# EAGLE board floppyemu (EAGLE 6.3)
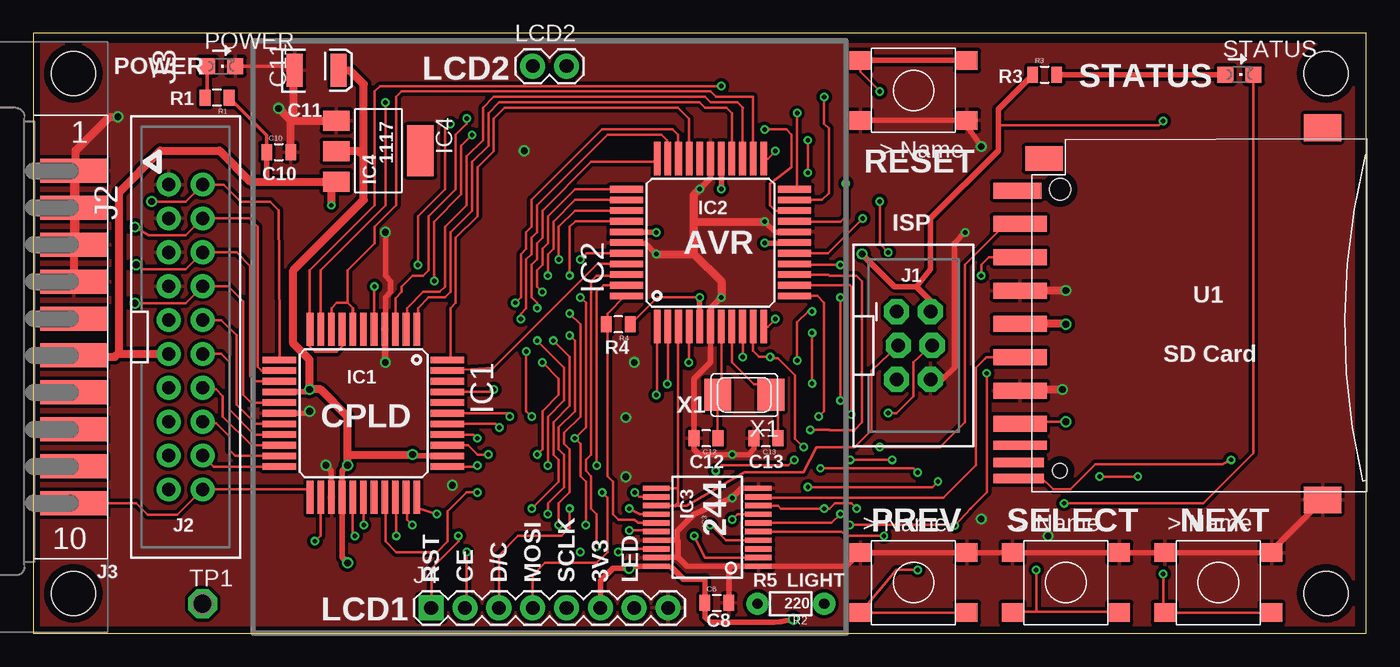
[diagram p0: board, top side]
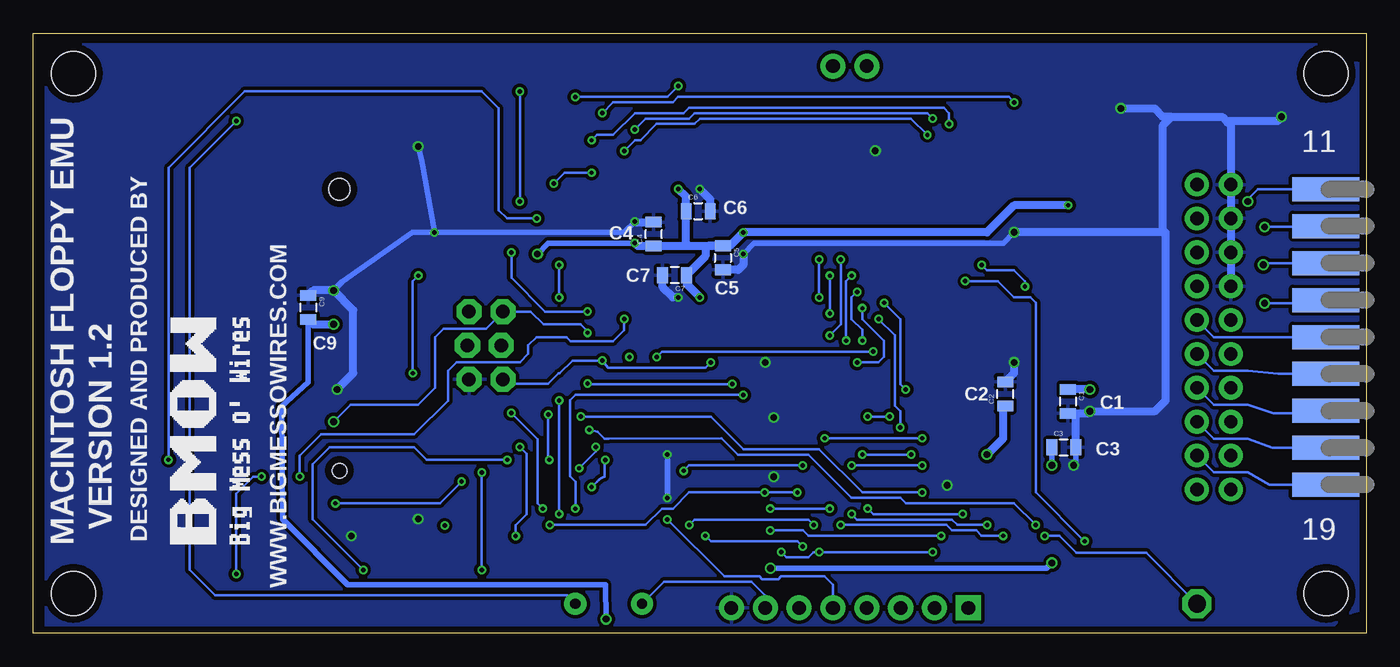
[diagram p1: board, bottom side, seen from below]

Size 100 x 45 mm. Coordinates in mm from the lower left corner, seen from the top.
Outline: 0,0 100,0 100,45 0,45 0,0
Copper layers (1*16): Top 0.035mm / dielectric 1.5mm / Bottom 0.035mm
Design rules "smart-prototyping": minimum track width 7mil, minimum drill 12mil, track to track 7mil, track to pad 7mil, pad to pad 7mil, via to via 7mil, smd to smd 0mil, copper to edge 20mil, drill to drill 10mil, minimum pad ring 10mil, minimum via ring 6mil, stop-mask expansion 2mil, vias tented up to drill 25mil, thermal gap 10mil

## Footprints (pad centres in the part's own frame; a part is rotated, then mirrored left to right if it is on the bottom)
0805 = smd 0.8 x 1.2: 1 -0.9,0; 2 0.9,0
EIA3528 = smd 1.2 x 2.5: A 1.65,0; C -1.65,0
TQFP44-LONGPADS = smd 2.5 x 0.5: 1 -6.3,4; 2 -6.3,3.2; 3 -6.3,2.4; 4 -6.3,1.6; 5 -6.3,0.8; 6 -6.3,0; 7 -6.3,-0.8; 8 -6.3,-1.6; 9 -6.3,-2.4; 10 -6.3,-3.2; 11 -6.3,-4; 23 6.3,-4; 24 6.3,-3.2; 25 6.3,-2.4; 26 6.3,-1.6; 27 6.3,-0.8; 28 6.3,0; 29 6.3,0.8; 30 6.3,1.6; 31 6.3,2.4; 32 6.3,3.2; 33 6.3,4 | smd 0.5 x 2.5: 12 -4,-6.3; 13 -3.2,-6.3; 14 -2.4,-6.3; 15 -1.6,-6.3; 16 -0.8,-6.3; 17 0,-6.3; 18 0.8,-6.3; 19 1.6,-6.3; 20 2.4,-6.3; 21 3.2,-6.3; 22 4,-6.3; 34 4,6.3; 35 3.2,6.3; 36 2.4,6.3; 37 1.6,6.3; 38 0.8,6.3; 39 0,6.3; 40 -0.8,6.3; 41 -1.6,6.3; 42 -2.4,6.3; 43 -3.2,6.3; 44 -4,6.3
BIG-MESS-O-WIRES_TQFP44-LONGPADS = smd 2.5 x 0.5: 1 -6.3,4; 2 -6.3,3.2; 3 -6.3,2.4; 4 -6.3,1.6; 5 -6.3,0.8; 6 -6.3,0; 7 -6.3,-0.8; 8 -6.3,-1.6; 9 -6.3,-2.4; 10 -6.3,-3.2; 11 -6.3,-4; 23 6.3,-4; 24 6.3,-3.2; 25 6.3,-2.4; 26 6.3,-1.6; 27 6.3,-0.8; 28 6.3,0; 29 6.3,0.8; 30 6.3,1.6; 31 6.3,2.4; 32 6.3,3.2; 33 6.3,4 | smd 0.5 x 2.5: 12 -4,-6.3; 13 -3.2,-6.3; 14 -2.4,-6.3; 15 -1.6,-6.3; 16 -0.8,-6.3; 17 0,-6.3; 18 0.8,-6.3; 19 1.6,-6.3; 20 2.4,-6.3; 21 3.2,-6.3; 22 4,-6.3; 34 4,6.3; 35 3.2,6.3; 36 2.4,6.3; 37 1.6,6.3; 38 0.8,6.3; 39 0,6.3; 40 -0.8,6.3; 41 -1.6,6.3; 42 -2.4,6.3; 43 -3.2,6.3; 44 -4,6.3
SSOP20 = smd 0.4 x 2: 1 -2.925,-3.825; 2 -2.275,-3.825; 3 -1.625,-3.825; 4 -0.975,-3.825; 5 -0.325,-3.825; 6 0.325,-3.825; 7 0.975,-3.825; 8 1.625,-3.825; 9 2.275,-3.825; 10 2.925,-3.825; 11 2.925,3.825; 12 2.275,3.825; 13 1.625,3.825; 14 0.975,3.825; 15 0.325,3.825; 16 -0.325,3.825; 17 -0.975,3.825; 18 -1.625,3.825; 19 -2.275,3.825; 20 -2.925,3.825
SOT223 = smd 1.499 x 2.007: 1 -2.261,-3.15; 2 0.025,-3.15; 3 2.311,-3.15 | smd 3.81 x 2.007: 4 0,3.15
BIG-MESS-O-WIRES_2X3-SHROUDED = drill 1.016 pad 1.88 octagon: 1 -1.27,2.54; 2 1.27,2.54; 3 -1.143,0; 4 1.397,0; 5 -1.27,-2.54; 6 1.27,-2.54
IDC20 = drill 1 pad 1.778: 1 -11.43,-1.27; 2 -11.43,1.27; 3 -8.89,-1.27; 4 -8.89,1.27; 5 -6.35,-1.27; 6 -6.35,1.27; 7 -3.81,-1.27; 8 -3.81,1.27; 9 -1.27,-1.27; 10 -1.27,1.27; 11 1.27,-1.27; 12 1.27,1.27; 13 3.81,-1.27; 14 3.81,1.27; 15 6.35,-1.27; 16 6.35,1.27; 17 8.89,-1.27; 18 8.89,1.27; 19 11.43,-1.27; 20 11.43,1.27
DB19EDGE = smd 1.8 x 5: 1 -12.465,3; 2 -9.695,3; 3 -6.925,3; 4 -4.155,3; 5 -1.385,3; 6 1.385,3; 7 4.155,3; 8 6.925,3; 9 9.695,3; 10 12.465,3 | smd 1.8 x 5 bottom: 11 -11.08,3; 12 -8.31,3; 13 -5.54,3; 14 -2.77,3; 15 0,3; 16 2.77,3; 17 5.54,3; 18 8.31,3; 19 11.08,3
1X08 = drill 1.016 pad 1.88 square: 1 0,0 | drill 1.016 pad 1.88: 2 2.54,0; 3 5.08,0; 4 7.62,0; 5 10.16,0; 6 12.7,0; 7 15.24,0; 8 17.78,0
1X02 = drill 1.016 pad 1.88: 1 0,0; 2 2.54,0
B3FS = smd 1.6 x 1.4: A 4,2.25; A' -4,2.25; B 4,-2.25; B' -4,-2.25
CHIPLED_0805 = smd 1.2 x 1.2: A 0,-1.05; C 0,1.05
1/6W-RES = drill 0.762 pad 1.676: 1 -2.5,0; 2 2.5,0
STAND-OFF = hole 3.302: 0,0
P1-13 = drill 1.321 pad 2.159 octagon: TP 0,0
ADAFRUIT_06132 = smd 1.2 x 4: 1 6.9,0.9; 2 4.4,0.9; 3 1.9,0.9; 4 -0.6,0.9; 5 -3.1,0.9; 6 -5.6,0.9; 7 -8.1,0.9 | smd 0.7 x 4: 8 -9.7,0.9 | smd 1.2 x 3.6: 9 9.4,1.1 | smd 0.7 x 3.8: CD -11,1; WP -12.2,1 | smd 2 x 2.8: GP -13.8,-21.8; GP2 14.1,-21.8 | smd 1.8 x 2.8: GP3 11.8,-0.9 | hole 1.1: -11.6,-2.1 | hole 1.6: 9.5,-2.1
NX5032 = smd 2 x 2.4: P$1 2,0; P$2 -2,0

## Placement (x,y rotation side)
C1  0.1uF  [0805]  22.38,17.4 270 bottom
C2  0.1uF  [0805]  27.08,17.96 90 bottom
C3  0.1uF  [0805]  22.68,13.94 0 bottom
C4  0.1uF  [0805]  53.47,29.95 90 bottom
C5  0.1uF  [0805]  48.26,28.17 270 bottom
C6  0.1uF  [0805]  50.11,31.67 0 bottom
C7  0.1uF  [0805]  51.89,26.87 180 bottom
C8  0.1uF  [0805]  51.28,2.29 0 top
C9  0.1uF  [0805]  79.38,24.45 270 bottom
C10  0.1uF  [0805]  18.41,36.09 0 top
C11  33uF  [EIA3528]  21.27,42.23 0 top
C12  18pF  [0805]  50.47,14.63 180 top
C13  18pF  [0805]  54.97,14.63 180 top
IC1  XC9572XLTQFP44  [TQFP44-LONGPADS]  24.77,16.51 270 top
IC2  BIG-MESS-O-WIRES_ATMEGA1284  [BIG-MESS-O-WIRES_TQFP44-LONGPADS]  50.8,29.31 90 top
IC3  74LVC244  [SSOP20]  50.57,7.95 90 top
IC4  REG1117  [SOT223]  25.88,36.2 270 top
J1  BIG-MESS-O-WIRES_AVR_ISP  [BIG-MESS-O-WIRES_2X3-SHROUDED]  66.04,21.59 0 top
J2  IDC20  [IDC20]  11.43,22.23 270 top
J3  DB19  [DB19EDGE]  0.03,22.23 270 top
J4  LCD1  [1X08]  29.84,1.91 0 top
LCD2  M02PTH  [1X02]  37.47,42.55 0 top
NEXT  B3FS-10XX  [B3FS]  88.9,3.81 0 top
POWER  [CHIPLED_0805]  14.1,42.53 270 top
PREV  B3FS-10XX  [B3FS]  66.04,3.81 0 top
R1  220R  [0805]  13.79,40.17 180 top
R2  220  [1/6W-RES]  56.83,2.22 180 top
R3  220R  [0805]  75.88,41.91 0 top
R4  10K  [0805]  43.89,23.16 180 top
RESET  B3FS-10XX  [B3FS]  66.04,40.72 180 top
SELECT  B3FS-10XX  [B3FS]  77.47,3.81 0 top
STANDOFF1  STAND-OFF  [STAND-OFF]  3,3 0 top
STANDOFF2  STAND-OFF  [STAND-OFF]  3,42 0 top
STANDOFF3  STAND-OFF  [STAND-OFF]  97,3 0 top
STANDOFF4  STAND-OFF  [STAND-OFF]  97,42 0 top
STATUS  [CHIPLED_0805]  90.49,41.91 270 top
TP1  PTR1PAD1-13  [P1-13]  12.7,2.22 0 top
U1  ADAFRUIT_SDMMC06132  [ADAFRUIT_06132]  74.93,23.81 90 top
X1  20 MHz  [NX5032]  53.34,17.88 180 top

## Library data of the parts
C1-C10 C12 C13 J4 R1 R3 R4 = SparkFun
C11 = SparkFun-Capacitors; PROD_ID: CAP-08310; VALUE: 47uF
IC1-IC3 J1-J3 NEXT PREV RESET SELECT U1 = big-mess-o-wires
IC4 = burr-brown; MPN: REG1117; OC_FARNELL: 1097566; OC_NEWARK: 14P6981
LCD2 = SparkFun-Connectors
POWER STATUS = led
R2 = SparkFun-Resistors
STANDOFF1-STANDOFF4 = SparkFun-Electromechanical
TP1 = testpad
X1 = adafruit

## Nets
+3V3: C1.1 C2.1 C3.1 C8.1 C9.2 C11.A IC1.15 IC1.26 IC1.35 IC3.20 IC4.2 J4.6 U1.4
+5V: C4.1 C5.1 C6.1 C7.1 C10.1 IC2.5 IC2.17 IC2.27 IC2.38 IC4.3 J1.2 J2.11 J3.6 R1.1 R2.1 R3.1 R4.1
/ENBL.EXT: IC1.20 J2.14 J3.17
/WREQ: IC1.18 J2.10 J3.15
/WREQM: IC1.5 IC2.19
BYTER/TDI: IC1.7 IC1.9 IC2.24
CLKO: IC1.43 IC2.41
D0: IC1.31 IC2.37
D1: IC1.32 IC2.36
D2: IC1.33 IC2.35
D3: IC1.34 IC2.34
D4: IC1.36 IC2.33
D5: IC1.38 IC2.32
D6: IC1.41 IC2.31
DC: IC2.15 IC3.6
DC33: IC3.14 J4.3
DIN/STA/TCK: IC1.8 IC1.11 IC2.21
EJECT: IC1.30 IC2.12
GND: C1.2 C2.2 C3.2 C4.2 C5.2 C6.2 C7.2 C8.2 C9.1 C10.2 C11.C C12.2 C13.2 IC1.4 IC1.17 IC1.25 IC2.6 IC2.18 IC2.28 IC2.39 IC3.1 IC3.10 IC3.17 IC3.19 IC4.1 J1.6 J2.1 J2.3 J2.5 J2.7 J3.1 J3.2 J3.3 J3.4 J4.8 NEXT.A NEXT.A' POWER.C PREV.A PREV.A' RESET.A RESET.A' SELECT.A SELECT.A' U1.3 U1.6 U1.GP
LCDE: IC2.42 IC3.2
LCDE33: IC3.18 J4.2
LEDD: IC2.43 STATUS.C
MISO: IC2.2 J1.1 U1.7
MOSI: IC2.1 IC3.8 J1.4
MOSI33: IC3.12 J4.4 U1.2
N$1: C13.1 IC2.8 X1.P$2
N$2: POWER.A R1.2
N$3: C12.1 IC2.7 X1.P$1
N$5: R3.2 STATUS.A
N$10: J4.7 R2.2
NEXT: IC2.11 NEXT.B NEXT.B'
OE: IC1.2 IC2.25
PH0: IC1.12 J2.2 J3.11
PH1: IC1.13 J2.4 J3.12
PH2: IC1.14 J2.6 J3.13
PH3: IC1.16 J2.8 J3.14
PREV: IC2.10 PREV.B PREV.B'
PWM: IC1.23 J2.20 J3.10
RD: IC1.21 J2.16 J3.18
RDAWRT: IC1.44 IC2.30
RESET: IC2.4 J1.5 RESET.B RESET.B'
RST: IC1.37 IC2.40 IC3.4
RST33: IC3.16 J4.1
SCK: IC2.3 IC3.11 IC3.13 J1.3
SCK33: IC3.9 U1.5
SCK33A: IC3.7 J4.5
SDE: IC2.44 IC3.15 R4.2
SDE33: IC3.5 U1.1
SEL: IC1.19 J2.12 J3.16
SELECT: IC2.13 SELECT.B SELECT.B'
SIDE: IC1.3 IC2.20
STPDIR_MOTOR: IC1.1 IC2.26
STPREQ: IC1.39 IC2.9
TACH: IC1.28 IC2.14
TDO: IC1.24 IC2.23
TEST: IC1.27 TP1.TP
TMS: IC1.10 IC2.22
WPROT: IC2.16 U1.WP
WR: IC1.22 J2.18 J3.19

## Tracks (layer width: path | path; a pad name or v marks a point on that pad's centre or on a via)
+3V3  (via drill 0.51)
  Top 0.406: v20.73,18.29 20.55,18.11 IC1.15 | v23.57,12.6 23.16,12.19 IC1.26 | v28.45,13.41 28.55,13.31 IC1.35 | IC1.26 | v44.7,4.88 44.45,5.03 | 44.45,5.03 IC3.20 47.64,5.03 47.95,4.88 48.77,4.06 50.39,4.06 50.38,4.05 C8.1 50.39,2.27 50.39,1.22 50.8,0.81 52.83,0.81 55.56,0.83 56.07,0.88 v57.02,1.07 | v23.57,5.28 23.16,5.69 IC1.26 | 44.45,5.03 44.3,4.88 43.48,4.88 42.55,3.94 J4.6
  Top 0.61: U1.4 77.44,23.21 v77.47,23.18 | 24.79,35.76 24.79,32.51 19.51,27.23 19.51,21.74 20.73,20.52 v20.73,18.29 21.54,18.29 23.57,16.26 23.57,13.41 | 24.79,35.76 24.38,36.17 IC4.2 | 24.79,35.76 24.79,41.18 23.75,42.23 C11.A | v23.57,12.6 23.57,13.41 | 23.57,13.41 v28.45,13.41
  Bottom 0.406: 22.37,18.29 C1.1 | C3.1 23.58,12.61 v23.57,12.6 | 27.23,16.91 C2.1 | v44.7,4.88 23.98,4.88 v23.57,5.28 | v57.02,1.07 57.07,3.66 76.4,3.66 78.84,6.1 78.84,6.13 81.28,8.57 81.38,17.02 79.38,18.82 C9.2
  Bottom 0.61: v77.47,23.18 79,23.18 C9.2 | 22.37,18.29 v20.73,18.29 v20.74,18.3 C1.1 | 27.23,16.91 27.23,14.63 v28.45,13.41
+5V  (via drill 0.33, 0.51)
  Top 0.203: R4.1 46.82,25.2 v49.99,25.2 | v84.77,38.42 84.45,38.1 72.39,38.1
  Top 0.254: R1.1 17.52,37.35 C10.1
  Top 0.406: C10.1 17.52,33.92 17.48,33.88 | IC2.5 49.99,23.02 v49.99,25.2 | IC2.17 57.05,29.26 v54.86,29.26 | IC2.27 51.61,35.6 v51.61,33.33 | IC2.38 44.54,30.07 v46.74,30.07 | v62.18,28.45 64.62,26.01 66.24,26.01 | 66.24,26.01 67.31,24.94 J1.2 | 66.24,26.01 67.31,27.3 67.31,31.11 72.39,36.2 72.39,38.1 72.39,39.32 R3.1
  Top 0.61: J3.6 3.11,20.73 6.12,20.73 6.43,21.03 | 6.43,21.03 6.43,33.1 9.53,36.2 13.97,36.2 16.28,33.88 17.48,33.88 IC4.3 22.35,33.5 v22.35,32.11 | 6.43,21.03 6.5,20.95 J2.11
  Bottom 0.203: v84.77,38.42 88.27,34.92 88.27,4.76 86.36,2.86 59.97,2.86 R2.1
  Bottom 0.406: 54.65,29.05 v54.86,29.26 61.37,29.26 v62.18,28.45 | 47.74,29.07 C5.1
  Bottom 0.61: 54.65,29.05 C4.1 50.8,29.05 | v49.99,25.2 50.99,26.2 C7.1 49.58,28.29 49.58,28.85 49.37,29.07 48.77,29.07 | v51.61,33.33 51.01,32.73 C6.1 51.01,29.26 50.8,29.05 | 47.74,29.07 v46.74,30.07 28.45,30.07 26.42,32.11 v22.35,32.11 | C5.1 48.77,29.07 | 50.8,29.05 48.79,29.05 48.77,29.07
/ENBL.EXT
  Top 0.203: J2.14 12.83,18.29 13.72,18.29 14.22,17.78 14.22,16.26 16.37,14.11 IC1.20
  Bottom 0.203: J2.14 11.43,17.14 8.89,17.14 6.99,16.51 3.81,16.51 3.63,16.68 J3.17
/WREQ
  Top 0.203: J2.10 14.1,23.5 15.24,22.35 15.24,17.14 16.68,15.71 IC1.18
  Bottom 0.203: J2.10 11.43,22.23 J3.15
/WREQM  (via drill 0.33)
  Top 0.203: IC1.5 25.57,25.97 v25.6,26.01 | v28.85,27.64 28.85,31.29 30.89,33.33 30.89,37.8 v31.29,38.2 | v58.12,36.98 v58.12,34.54 | v60.96,33.73 60.96,31.29 60.55,30.89 57.12,30.89 IC2.19
  Bottom 0.203: v25.6,26.01 25.6,26.42 26.42,27.23 28.45,27.23 v28.85,27.64 | v31.29,38.2 31.29,39.01 31.7,39.42 50.8,39.42 51.21,39.01 54.86,39.01 56.49,37.39 57.71,37.39 v58.12,36.98 | v58.12,34.54 60.15,34.54 v60.96,33.73
BYTER/TDI
  Top 0.203: IC2.24 54,40.23 51.21,40.23 50.8,40.64 27.64,40.64 27.23,40.23 27.23,32.11 25.6,30.48 25.6,29.26 23.57,27.23 23.57,24.79 | IC1.9 22.36,24.4 22.76,24.79 23.57,24.79 | 23.98,24.38 23.98,22.82 IC1.7 23.96,24.37 23.98,24.38 | 23.57,24.79 23.98,24.38
CLKO
  Top 0.203: IC2.41 42.34,27.71 34.54,19.91 IC1.43
D0  (via drill 0.33)
  Top 0.203: IC1.31 27.23,10.15 v27.23,7.32 | v39.42,8.13 39.42,9.75 40.23,10.57 40.23,13.82 39.83,14.22 39.83,15.04 41.05,16.26 41.05,23.16 v40.23,23.98 | v40.23,26.82 40.23,30.48 40.66,30.91 IC2.37
  Bottom 0.203: v27.23,7.32 28.85,7.32 29.26,7.72 31.09,7.72 31.5,8.13 v39.42,8.13 | v40.23,23.98 v40.23,26.82
D1  (via drill 0.33)
  Top 0.203: IC1.32 28.04,10.13 28.04,8.53 v28.45,8.13 | v38.61,8.94 38.61,9.75 39.83,10.97 39.83,13.41 39.42,13.82 39.42,15.44 40.64,16.66 40.64,21.95 v40.23,22.35 | v39.42,28.04 39.42,30.48 40.64,31.7 44.49,31.7 IC2.36
  Bottom 0.203: v28.45,8.13 30.68,8.13 31.09,8.53 38.2,8.53 v38.61,8.94 | v40.23,22.35 39.42,23.16 v39.42,28.04
D2  (via drill 0.33)
  Top 0.203: IC1.33 28.77,9.44 v30.28,8.94 | v37.39,9.35 39.42,11.38 39.42,13.01 39.01,13.41 39.01,15.85 40.23,17.07 40.23,20.73 v39.01,21.95 | v38.61,26.82 38.61,28.45 39.01,28.85 39.01,30.89 40.64,32.51 IC2.35 | IC2.35
  Bottom 0.203: v30.28,8.94 36.98,8.94 v37.39,9.35 | v39.01,21.95 39.01,26.42 v38.61,26.82
D3  (via drill 0.33)
  Top 0.203: IC1.34 33.24,12.51 v33.33,12.6 | v38.61,12.6 38.61,16.26 39.83,17.48 39.83,19.91 v37.8,21.95 | v38.2,25.6 37.8,26.01 37.8,27.23 38.2,27.64 38.2,28.85 38.61,29.26 38.61,31.29 40.64,33.33 44.49,33.33 IC2.34
  Bottom 0.203: v33.33,12.6 v38.61,12.6 | v37.8,21.95 37.8,22.76 38.61,23.57 38.61,25.2 v38.2,25.6
D4  (via drill 0.33)
  Top 0.203: IC1.36 32.63,14.11 33.33,13.41 v34.14,13.41 | v37.8,13.41 38.2,13.82 38.2,16.66 39.42,17.88 39.42,19.1 v38.2,20.32 | v37.8,24.38 37.8,24.79 37.39,25.2 37.39,27.64 37.8,28.04 37.8,29.26 38.2,29.67 38.2,31.7 41.86,35.36 46.55,35.36 IC2.33
  Bottom 0.203: v34.14,13.41 v37.8,13.41 | v38.2,20.32 36.58,20.32 36.17,20.73 36.17,21.95 37.8,23.57 v37.8,24.38
D5  (via drill 0.33)
  Top 0.203: IC1.38 34.68,15.71 v34.95,15.44 | v36.58,23.57 36.58,23.98 36.98,24.38 36.98,28.04 37.39,28.45 37.39,29.67 37.8,30.07 37.8,32.11 43.08,37.39 47.14,37.39 47.55,36.98 47.55,35.66 IC2.32
  Bottom 0.203: v34.95,15.44 34.95,16.66 35.36,17.07 35.36,22.35 v36.58,23.57
D6  (via drill 0.33)
  Top 0.203: IC1.41 34.37,18.11 v34.54,18.29 | v36.17,24.79 36.58,25.2 36.58,28.45 36.98,28.85 36.98,30.07 37.39,30.48 37.39,32.51 42.67,37.8 47.95,37.8 48.36,37.39 48.36,35.65 IC2.31
  Bottom 0.203: v34.54,18.29 34.95,18.69 34.95,23.57 v36.17,24.79
DC  (via drill 0.33)
  Top 0.203: IC3.6 59.89,8.28 v60.55,8.94 | v60.55,17.48 v60.55,25.2 | v60.55,27.64 57.18,27.64 IC2.15
  Bottom 0.203: v60.55,8.94 v60.55,17.48 | v60.55,25.2 v60.55,27.64
DC33  (via drill 0.33)
  Top 0.203: v44.7,9.35 45.53,8.93 IC3.14 | v40.23,9.35 40.23,7.92 39.62,7.32 36.37,7.32 34.92,5.87 J4.3
  Bottom 0.203: v40.23,9.35 v44.7,9.35
DIN/STA/TCK  (via drill 0.33)
  Top 0.203: IC2.21 59.18,32.51 59.69,33.02 59.69,37.87 59.33,38.23 v59.33,40.23 | v51.61,41.05 26.01,41.05 25.6,40.64 25.6,32.11 20.73,27.23 20.73,22.85 IC1.11 20.73,22.77 20.73,21.54 21.13,21.13 22.76,21.13 23.16,21.54 23.16,22.35 | 23.16,22.35 | 23.16,22.35 IC1.8
  Bottom 0.203: v51.61,41.05 52.43,40.23 v59.33,40.23
EJECT  (via drill 0.33)
  Top 0.203: IC2.12 58.81,25.31 59.33,24.79 59.33,16.66 v58.93,16.26 | v33.33,10.57 32.51,10.57 31.09,9.14 31.09,6.91 30.28,6.1 27.23,6.1 26.42,6.91 26.42,10.16 IC1.30
  Bottom 0.203: v58.93,16.26 49.17,16.26 46.74,13.82 41.05,13.82 37.8,10.57 v33.33,10.57
GND  (via drill 0.33, 0.51)
  Top 0.203: 49.58,14.64 C12.2
  Top 0.254: POWER.C 19.32,42.53 C11.C
  Top 0.406: v20.73,16.66 20.57,16.51 IC1.17 | v21.95,12.6 22.35,12.19 22.35,10.22 IC1.25 22.35,10.2 | IC1.4 26.36,20.37 v26.42,20.32 26.42,25.2 26.82,25.6 26.82,26.42 26.42,26.82 v26.42,30.07 | C10.2 19.32,38.26 19.51,38.46 | IC2.18 57.06,30.07 55.68,30.07 v54.86,30.89 | IC2.28 50.8,34.14 v49.99,33.33 | IC2.39 44.55,29.26 45.92,29.26 v46.74,28.45 | v51.61,25.2 50.8,24.38 IC2.6 50.8,20.32 49.58,19.1 49.58,14.64 | v77.47,25.72 77.62,25.72 | C12.2 49.58,13.82 49.99,13.41 v52.43,13.41 53.65,13.41 54.07,13.83 C13.2 | 48.36,5.69 46.76,5.69 | 48.36,5.69 49.03,5.03 52.02,5.03 52.18,4.86 | IC3.10 53.14,10.88 v52.43,10.16 49.58,8.94 48.3,7.66 48.3,6.97 | 52.18,4.86 C8.2 | 48.36,5.69 48.35,5.67 | 48.36,5.69 48.36,6.91 48.3,6.97 | 48.3,6.97 IC3.17 | J3.3 3.22,28.96 | U1.GP 92.9,6.18 NEXT.A NEXT.A' SELECT.A SELECT.A' PREV.A PREV.A' 61.01,5.03 IC3.1 52.35,5.03 52.18,4.86 | RESET.A RESET.A' | RESET.A' 69.9,38.33 | J1.6 68.22,19.05 69.09,19.91 69.09,29.26 v69.9,30.07 | v71.12,36.51 69.85,38.28 arc-90 RESET.A'
  Top 0.61: J3.4 J3.3 J3.2 J3.1 1.77,34.69 1.63,34.54 | U1.3 v77.47,25.71 v77.47,25.72 | 19.51,38.46 IC4.1 22.54,38.64 | v51.61,25.2 51.61,26.42 49.58,28.45 | v46.74,28.45 49.58,28.45 | 49.58,28.45 49.58,30.89 | 49.58,30.89 49.58,32.92 v49.99,33.33 | 49.58,30.89 v54.86,30.89 | C10.2 19.32,38.47 | 19.32,38.47 v18.41,39.37 | 3.22,28.96 3.17,29 3.17,36.2 5.71,38.73 v6.35,38.73 | U1.6 74.11,18.29 v77.22,18.29 | 19.32,38.47 19.51,38.66 19.51,41.45 19.62,41.57 C11.C
  Bottom 0.406: C1.2 22.21,16.66 | C3.2 21.78,12.76 v21.95,12.6 | 10.16,28.85 J2.1 | C5.2 47.18,27.27 47.14,27.23 46.74,27.64 | v46.74,28.45 45.92,29.26 27.23,29.26 v26.42,30.07 | v54.86,30.89 55.68,30.07 v69.9,30.07 | v77.47,25.72 76.83,26.35 71.53,30.07 v69.9,30.07 | v52.43,13.41 v52.43,10.16 | 69.76,30.07 v69.9,30.07 | v69.9,30.07 70.85,35.51 v71.12,36.51
  Bottom 0.61: C9.1 79,25.72 v77.47,25.72 76,24.24 76,19.51 v77.22,18.29 | J2.7 J2.5 J2.3 J2.1 10.16,38.1 10.48,38.42 | C2.2 26.42,19.52 v26.42,20.32 | C3.2 21.78,16.5 C1.2 20.89,16.5 v20.73,16.66 15.85,16.66 15.04,17.48 15.04,29.87 15.24,30.07 | 15.04,30.07 15.24,30.07 | 15.24,30.07 v26.42,30.07 | C7.2 52.79,25.97 52.02,25.2 v51.61,25.2 | v49.99,33.33 49.21,32.55 C6.2 | v46.74,28.45 46.74,27.64 47.1,27.27 C5.2 | C4.2 54.82,30.85 v54.86,30.89 | v18.41,39.37 15.88,39.37 15.24,38.73 14.61,38.73 | 15.24,30.07 15.24,38.1 14.61,38.73 | 14.61,38.73 10.79,38.73 10.48,38.42 | v6.35,38.73 6.67,38.42 10.48,38.42
  other vias: 36.83,36.2 71.12,8.57 44.45,11.75 44.45,16.19 31.43,11.11 45.09,20.32 76.14,7.3
  pour Bottom (isolate 0.254): 0.51,0.51 99.06,0.51 99.06,44.2 0.51,44.2
  pour Top (isolate 0.254): 0.51,0.51 99.06,0.51 99.06,44.2 0.51,44.2
LCDE  (via drill 0.33)
  Top 0.203: IC2.42 44.41,26.82 42.27,26.82 41.86,26.42 41.86,13.41 41.45,13.01 41.45,12.19 41.86,11.79 41.86,9.35 42.27,8.94 v42.27,6.5 | v49.58,7.32 50.41,5.67 IC3.2
  Bottom 0.203: v42.27,6.5 42.67,6.91 49.17,6.91 v49.58,7.32
LCDE33  (via drill 0.33)
  Top 0.203: IC3.18 44.12,6.33 v43.89,6.1 | v32.51,6.1 32.51,2.03 J4.2
  Bottom 0.203: v32.51,6.1 v41.05,6.1 41.45,6.1 41.86,5.69 43.48,5.69 v43.89,6.1
LEDD  (via drill 0.33)
  Top 0.203: 91.71,42.08 STATUS.C 91.54,13.51 87.78,9.75 v77.33,9.75 | IC2.43 42.77,26.11 42.27,25.6 v42.27,12.6 | v51.21,12.19 51.61,12.6 56.67,12.6 v57.07,13.01 | v58.12,10.97 67.46,10.97 v67.87,11.38
  Bottom 0.203: v42.27,12.6 50.8,12.6 v51.21,12.19 | v57.07,13.01 57.15,13.02 57.15,11.75 arc-23 57.71,11.38 v58.12,10.97 | v77.33,9.75 69.49,9.75 v67.87,11.38
MISO  (via drill 0.33, 0.51)
  Top 0.203: v47.55,18.69 47.6,18.75 IC2.2 | v77.47,15.88 74.19,15.88 U1.7 | v58.42,18.73 v58.42,22.54
  Bottom 0.203: v47.55,18.69 58.38,18.69 arc90 v58.42,18.73 | v77.47,15.88 76.2,17.14 71.12,17.14 69.85,18.41 69.85,22.23 69.22,22.86 66.04,22.86 J1.1 62.7,24.13 61.73,23.16 58.93,23.16 58.42,22.66 v58.42,22.54
MOSI  (via drill 0.33)
  Top 0.203: v61.77,9.35 61.37,9.75 60.15,9.75 59.74,9.35 v59.33,9.35 56.08,9.35 55.85,9.57 IC3.8 | IC2.1 46.8,17.95 v46.74,17.88 | v64.14,16.51 64.77,16.51 66.04,17.78 66.04,20.32 J1.4
  Bottom 0.203: v64.14,16.51 62.18,14.55 62.18,9.75 v61.77,9.35 | v46.74,17.88 59.33,17.88 59.74,17.48 59.74,11.79 59.33,11.38 v59.33,9.35
MOSI33  (via drill 0.33)
  Top 0.203: v42.67,10.57 43.08,10.16 43.08,6.1 42.27,5.28 38.41,5.28 37.47,4.34 J4.4 | v45.11,10.57 45.45,10.22 IC3.12 | v71.12,26.82 71.12,27.64 71.7,28.21 U1.2 | v71.53,19.51 71.53,10.57 70.31,9.35 v69.14,8.08 69.09,8.13 v61.25,8.13
  Bottom 0.203: v42.67,10.57 v45.11,10.57 50.8,10.57 52.02,9.35 52.83,9.35 54.05,8.13 v61.25,8.13 | v71.12,26.82 71.53,26.42 v71.53,19.51
N$1
  Top 0.203: IC2.8 52.43,22.99 52.43,20.32 54.05,18.69 55.68,18.69 55.47,18.49 | 55.47,18.49 55.34,18.36 X1.P$2 | C13.1 55.87,18.49 55.47,18.49
N$2
  Top 0.254: R1.2 13.05,40.33 POWER.A
N$3
  Top 0.203: IC2.7 51.61,23 51.61,18.69 51.34,18.42 X1.P$1 51.34,14.66 C12.1
N$5
  Top 0.406: R3.2 STATUS.A
N$10
  Bottom 0.203: J4.7 45.09,2.82 46.13,3.86 52.69,3.86 R2.2
NEXT  (via drill 0.33)
  Top 0.203: v55.68,23.57 55.12,23.01 IC2.11 | NEXT.B NEXT.B' 84.77,1.69 v84.77,4.45 | v80.01,11.75 v82.87,11.75
  Bottom 0.203: v55.68,23.57 55.68,22.75 56.52,21.91 59.69,21.91 60.01,22.23 62.23,22.23 62.87,21.59 62.87,20.95 63.5,20.32 68.26,20.32 68.9,19.68 68.9,17.46 71.44,14.92 78.42,14.92 80.01,13.34 v80.01,11.75 | v82.87,11.75 83.5,11.75 84.77,10.48 v84.77,4.45
OE
  Top 0.203: IC2.25 53.2,39.38 53.24,39.42 52.83,39.83 50.8,39.83 50.39,40.23 34.54,40.23 33.73,39.42 33.73,36.98 32.51,35.76 32.51,32.11 30.89,30.48 30.89,26.01 30.48,25.6 29.26,25.6 28.04,24.38 28.04,22.89 IC1.2
PH0  (via drill 0.51)
  Top 0.203: IC1.12 18.46,22.81 18.41,31.75 17.78,32.38 15.56,32.38 14.29,33.66 J2.2 11.43,32.38 v8.89,32.38
  Bottom 0.203: 3.02,33.33 8.13,33.33 8.89,32.56 v8.89,32.38
  Bottom 0.61: J3.11 3.02,33.33
PH1  (via drill 0.51)
  Top 0.203: v7.62,30.48 8.66,29.84 11.43,29.84 J2.4 16.19,31.11 16.83,30.48 16.83,20 17.12,19.71 IC1.13
  Bottom 0.203: J3.12 3.06,30.48 v7.62,30.48
PH2  (via drill 0.51)
  Top 0.203: IC1.14 16.65,18.91 16.28,19.28 16.28,27.53 15.24,28.57 J2.6 11.43,27.3 8.26,27.3 7.92,27.64 v7.72,27.64
  Bottom 0.203: J3.13 7.59,27.77 v7.72,27.64
PH3  (via drill 0.51)
  Top 0.203: IC1.16 16.34,17.31 15.75,17.91 15.75,24.89 14.61,26.04 J2.8 11.43,24.77 v7.62,24.77
  Bottom 0.203: J3.14 4.85,25 5.08,24.77 v7.62,24.77
PREV  (via drill 0.33)
  Top 0.203: IC2.10 54,21.18 54.46,20.73 v55.27,20.73 55.36,20.64 55.88,20.64 57.15,19.37 57.15,14.61 v57.78,13.97 | PREV.B PREV.B' 64.77,4.76 v66.36,4.76 | v66.36,12.06 66.04,12.38 v59.05,12.38
  Bottom 0.203: v66.36,4.76 v66.36,12.06 | v59.05,12.38 57.78,13.65 v57.78,13.97
PWM
  Top 0.203: J3.10 7.7,9.76 8.57,8.89 10.79,8.89 J2.20 20.64,10.79 20.64,10.34 IC1.23
RD
  Top 0.203: IC1.21 15.14,13.31 14.73,13.72 14.73,14.73 13.72,15.75 12.83,15.75 J2.16
  Bottom 0.203: J2.16 11.43,14.61 8.89,14.61 7.04,13.91 J3.18
RDAWRT
  Top 0.203: IC2.30 49.2,38.58 48.36,39.42 35.36,39.42 34.54,38.61 34.54,36.17 33.33,34.95 33.33,31.29 31.7,29.67 31.7,24.79 31.29,24.38 31.29,20.74 IC1.44
RESET  (via drill 0.33)
  Top 0.203: v49.17,20.32 49.2,20.35 IC2.4 | RESET.B 62.04,42.1 v63.5,40.64 | v63.5,32.38 63.5,29.21 v64.14,28.57 | v58.42,24.13 58.1,24.13 57.3,23.33 v57.3,20.46
  Top 0.406: RESET.B RESET.B'
  Bottom 0.203: v49.17,20.32 49.58,19.91 56.9,19.91 v57.3,20.46 59.55,20.46 60.5,19.51 60.58,19.51 61.37,18.72 64.44,18.72 J1.5 | v63.5,40.64 v63.5,32.38 | v64.14,28.57 64.14,26.67 61.59,24.13 v58.42,24.13
RST  (via drill 0.33)
  Top 0.203: 44.44,28.45 IC2.40 41.52,28.51 v41.05,28.04 | v41.05,25.2 41.45,24.79 41.45,15.44 v40.64,14.63 41.05,14.22 41.05,11.79 41.45,11.38 v41.45,8.13 | v50.8,8.13 51.95,6.97 IC3.4 | v33.33,14.63 33.05,14.91 IC1.37
  Bottom 0.203: v41.45,8.13 41.86,8.53 50.39,8.53 v50.8,8.13 | v41.05,25.2 v41.05,28.04 | v33.33,14.63 v40.64,14.63
RST33  (via drill 0.33)
  Top 0.203: IC3.16 46.65,7.72 v44.7,7.72 | v31.9,7.32 31.9,6.91 29.87,4.88 29.87,1.93 J4.1
  Bottom 0.203: v44.7,7.72 42.27,7.72 41.86,7.32 v31.9,7.32
SCK
  Top 0.203: IC2.3 48.36,22.97 48.36,10.97 | 48.36,10.97 48.26,10.88 IC3.11 | IC3.13 48.18,9.57 49,9.57 53.34,12.06 57.78,12.06 58.74,13.97 61.59,13.97 62.87,15.24 62.87,19.68 J1.3 | 48.36,9.75 48.36,10.97
  Top 0.254: 48.18,9.57 48.36,9.75
SCK33
  Top 0.203: IC3.9 54.46,10.16 68.28,10.16 70.71,12.6 70.71,19.91 71.4,20.6 71.51,20.71 U1.5
SCK33A  (via drill 0.33)
  Top 0.203: IC3.7 54.38,8.94 52.83,8.94 v52.43,8.53
  Bottom 0.203: v52.43,8.53 48.16,4.27 45.52,4.27 45.31,4.06 44.09,4.06 43.89,4.27 40.64,4.27 40.01,3.63 J4.5
SDE
  Top 0.203: IC2.44 44.41,25.31 43.08,23.98 43.08,23.25 R4.2 43.08,23.08 43.08,11.79 43.48,11.38 43.48,8.94 43.89,8.53 45.11,8.53 45.37,8.28 IC3.15
SDE33  (via drill 0.33)
  Top 0.203: v63.5,13.97 68.02,13.97 69.9,15.85 69.9,27.64 72.98,30.71 U1.1 | IC3.5 60.64,7.62 60.96,7.3 v63.82,7.3
  Bottom 0.203: v63.5,13.97 62.99,13.46 62.99,8.94 63.82,8.12 v63.82,7.3
SEL
  Top 0.203: J2.12 14.1,20.95 14.73,20.32 14.73,16.76 16.59,14.91 IC1.19
  Bottom 0.203: J2.12 11.43,19.68 8.89,19.68 6.58,19.45 J3.16
SELECT  (via drill 0.33)
  Top 0.203: v61.37,16.41 61.37,26.01 61.26,26.11 IC2.13 | SELECT.B 81.4,1.63 75.25,1.63 | 75.25,1.63 73.97,1.63 73.9,1.56 SELECT.B' | v61.28,13.02 v64.45,13.02 | v75.25,4.76 75.25,1.63
  Bottom 0.203: v61.37,16.41 61.37,13.11 v61.28,13.02 | v64.45,13.02 70.48,13.02 71.44,13.97 77.79,13.97 79.06,12.7 79.06,8.57 v75.25,4.76
SIDE  (via drill 0.33)
  Top 0.203: IC1.3 27.16,25.13 27.64,25.6 27.64,26.01 28.45,26.82 29.26,26.82 29.67,27.23 29.67,31.29 31.7,33.33 31.7,37.39 32.51,38.2 v32.51,38.61 | v54.86,37.8 56.49,37.8 56.9,37.39 56.9,34.95 55.27,33.73 55.27,32.11 55.68,31.7 IC2.20
  Bottom 0.203: v32.51,38.61 32.92,39.01 50.39,39.01 50.8,38.61 54.05,38.61 v54.86,37.8
STPDIR_MOTOR
  Top 0.203: IC2.26 52.4,38.99 52.43,39.01 52.02,39.42 50.39,39.42 49.99,39.83 34.95,39.83 34.14,39.01 34.14,36.58 32.92,35.36 32.92,31.7 31.29,30.07 31.29,25.6 30.89,25.2 29.67,25.2 28.85,24.38 28.85,22.9 IC1.1
STPREQ  (via drill 0.33)
  Top 0.203: IC2.9 53.24,22.97 v53.24,20.73 | v36.98,21.13 36.98,16.66 v37.39,16.26 | v35.76,16.26 35.61,16.51 IC1.39
  Bottom 0.203: v53.24,20.73 52.83,21.13 v36.98,21.13 | v35.76,16.26 v37.39,16.26
TACH  (via drill 0.33)
  Top 0.203: IC2.14 59.65,26.91 59.74,26.82 61.77,26.82 62.18,26.42 62.18,15.82 61.59,15.24 59.74,15.24 59.72,15.27 v58.29,15.27 | v24.79,8.13 24.79,10.19 IC1.28
  Bottom 0.203: v58.29,15.27 57.66,15.11 57.15,14.61 56.83,14.61 48.36,14.63 47.14,13.41 41.86,13.41 38.61,10.16 34.95,10.16 34.54,9.75 26.42,9.75 v24.79,8.13
TDO  (via drill 0.33)
  Top 0.203: IC2.23 55.12,35.61 v55.68,36.17 | v32.92,37.39 32.11,36.58 32.11,32.92 30.07,30.89 v30.07,26.42 | v21.13,6.91 21.54,7.32 21.54,10.18 IC1.24
  Bottom 0.203: v32.92,37.39 34.14,38.61 49.99,38.61 50.39,38.2 53.24,38.2 54.46,36.98 54.86,36.98 v55.68,36.17 | v30.07,26.42 27.64,26.42 26.42,25.2 25.2,25.2 24.79,24.79 24.79,10.57 v21.13,6.91
TEST  (via drill 0.33)
  Top 0.203: IC1.27 23.97,7.46 v24.13,7.3
  Bottom 0.203: v24.13,7.3 23.02,7.3 21.75,6.03 16.51,6.03 TP1.TP
TMS  (via drill 0.33)
  Top 0.203: IC1.10 21.57,26.8 21.54,26.82 21.54,27.23 26.42,32.11 v26.42,39.83 | IC2.22 57.3,33.33 v57.3,39.01
  Bottom 0.203: v26.42,39.83 26.82,40.23 51.61,40.23 52.02,39.83 56.49,39.83 v57.3,39.01
WPROT  (via drill 0.33)
  Top 0.203: IC2.16 59.63,28.51 v62.23,31.11 | v89.85,13.02 89.22,12.7 79.69,12.7 77.79,10.79 76.52,10.79 75.56,11.75 74.06,11.75 U1.WP
  Bottom 0.203: v62.23,31.11 64.45,31.11 65.09,31.75 65.09,39.37 66.36,40.64 84.14,40.64 89.85,34.92 v89.85,13.02
WR
  Top 0.203: J2.18 13.53,12.51 IC1.22
  Bottom 0.203: J2.18 11.43,12.06 8.89,12.06 7.27,11.14 J3.19

## Text on the board
tPlace: POWER | LCD2 | R1 | R3 | STATUS | C11 | 1117 | RESET | C10 | IC4 | IC2 | ISP | AVR | J1 | U1 | R4 | SD Card | IC1 | X1 | CPLD | C12 | C13 | 244 | IC3 | J2 | PREV | SELECT | NEXT | J3 | RST | CE | D/C | MOSI | SCLK | 3V3 | LED | R5 | LIGHT | LCD1 | C8
bPlace: MACINTOSH FLOPPY EMU | DESIGNED AND PRODUCED BY | C6 | C4 | WWW.BIGMESSOWIRES.COM | C7 | C5 | VERSION 1.2 | C9 | C1 | C2 | C3